# EAGLE board DC_brake(PIC) (EAGLE 7.4.0)
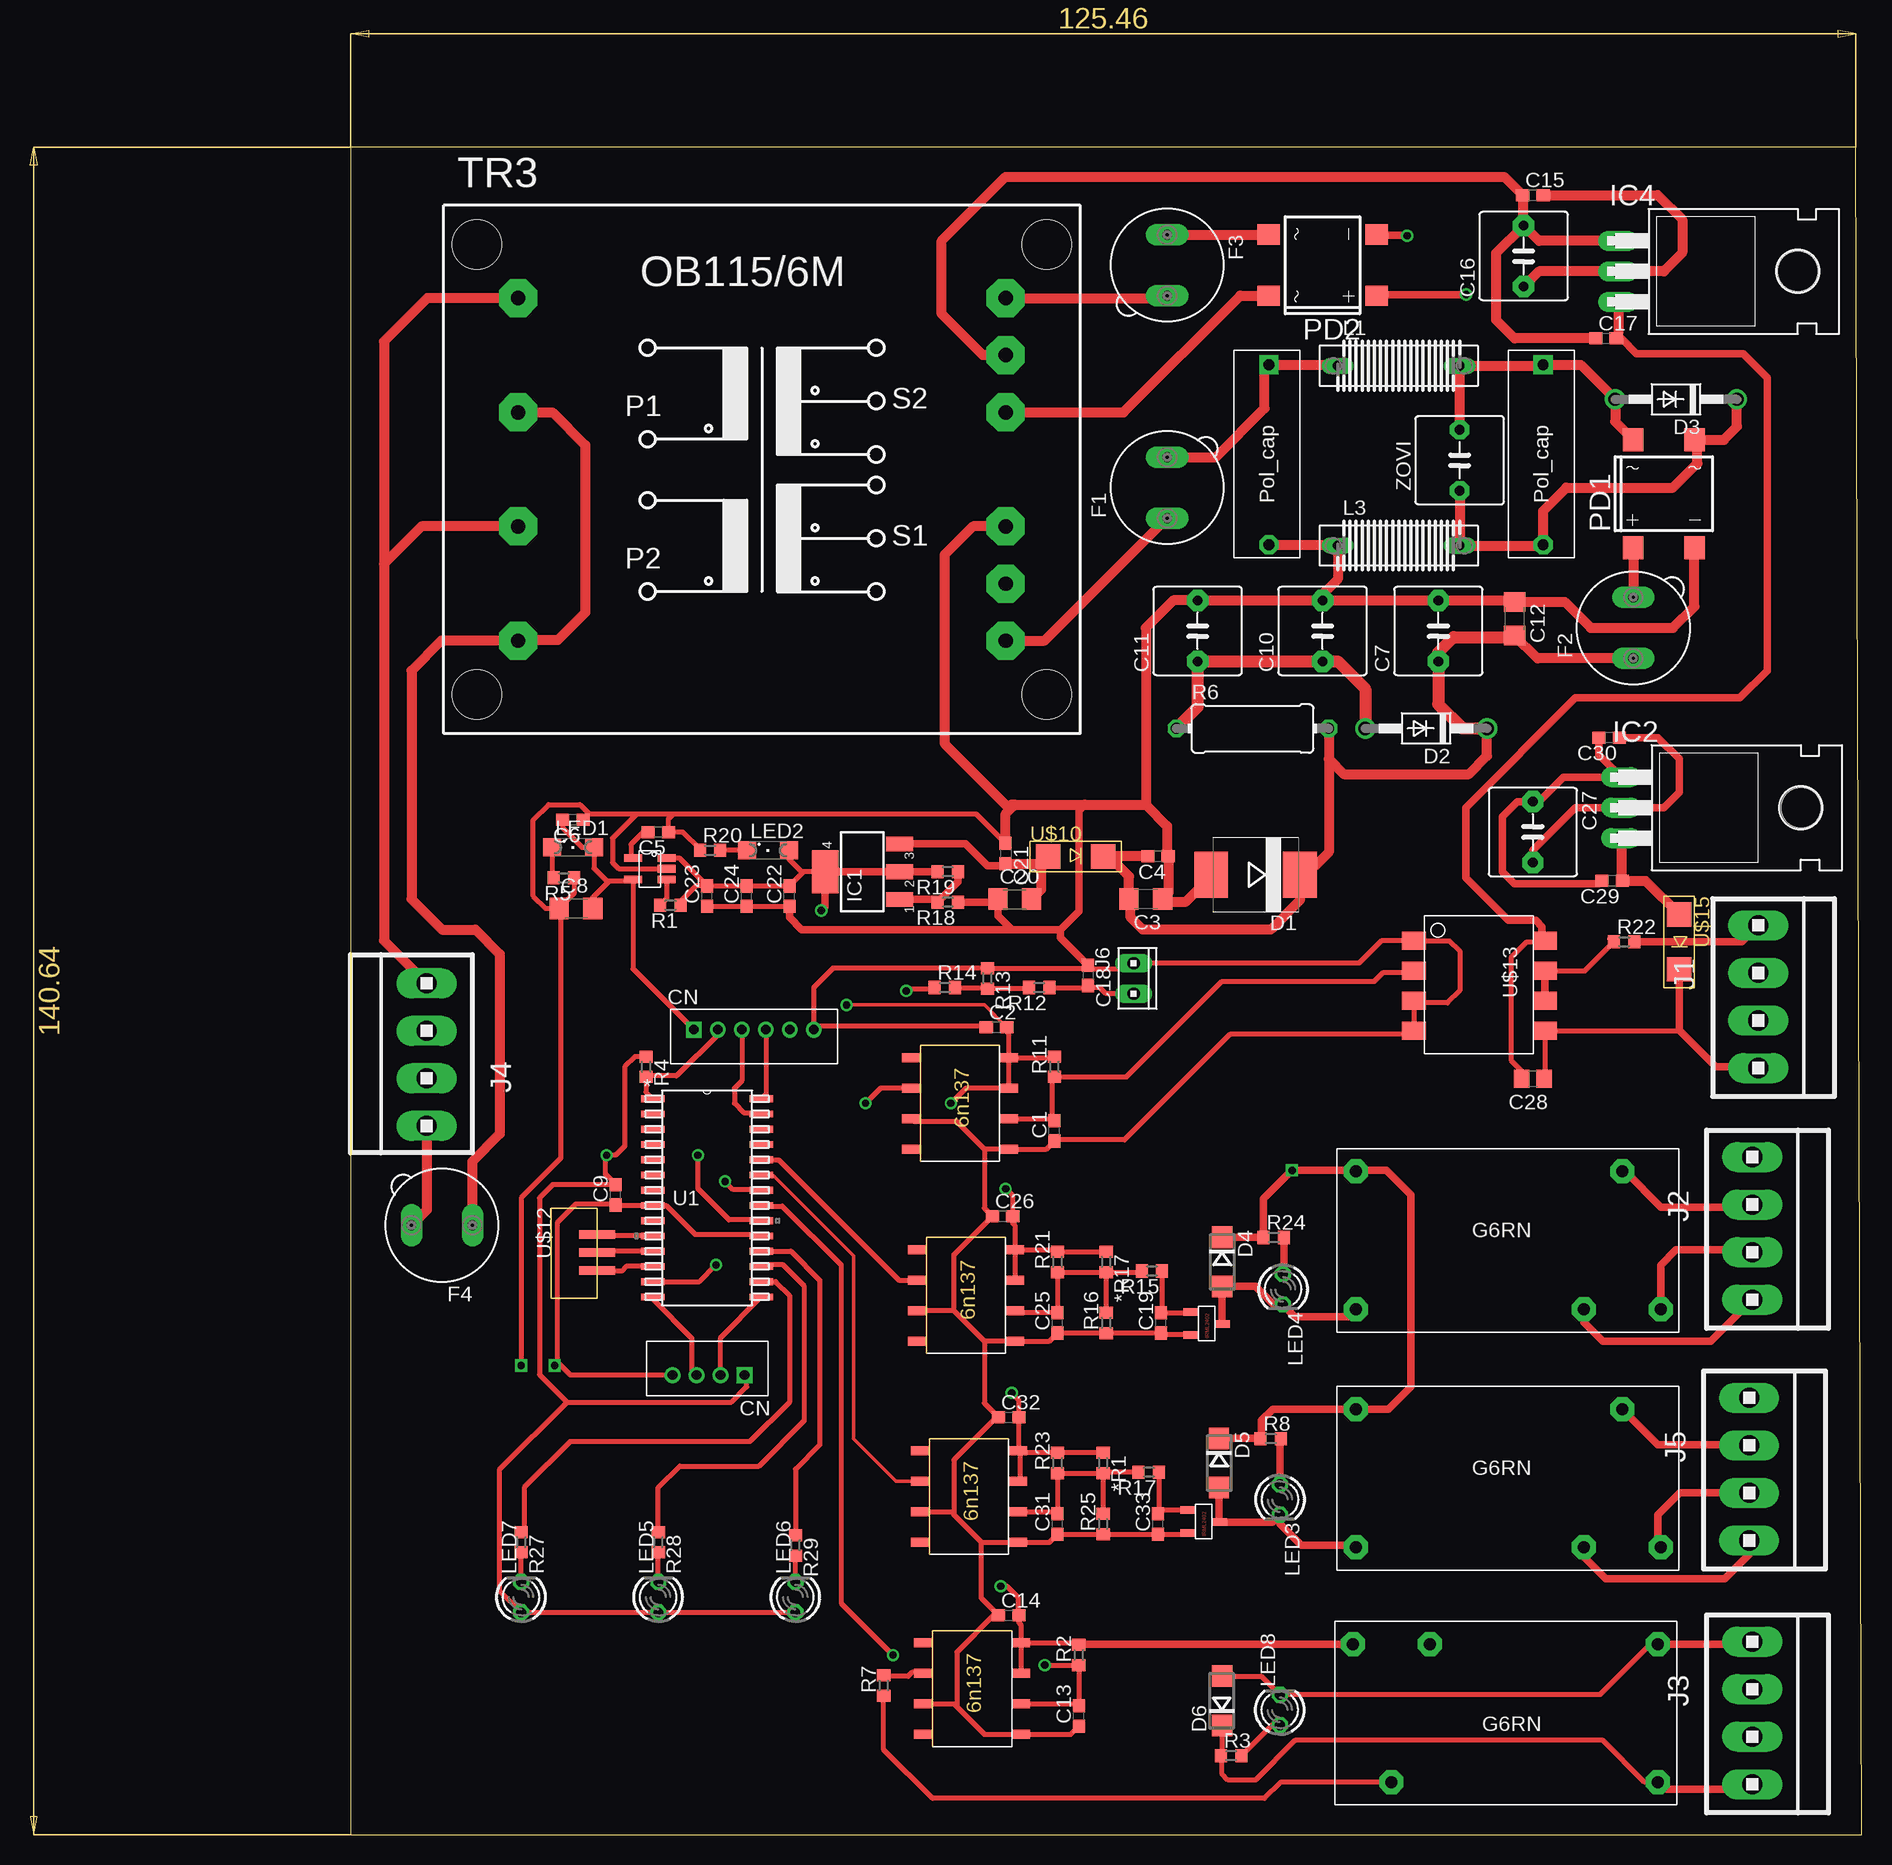
[diagram p0: board, top side]
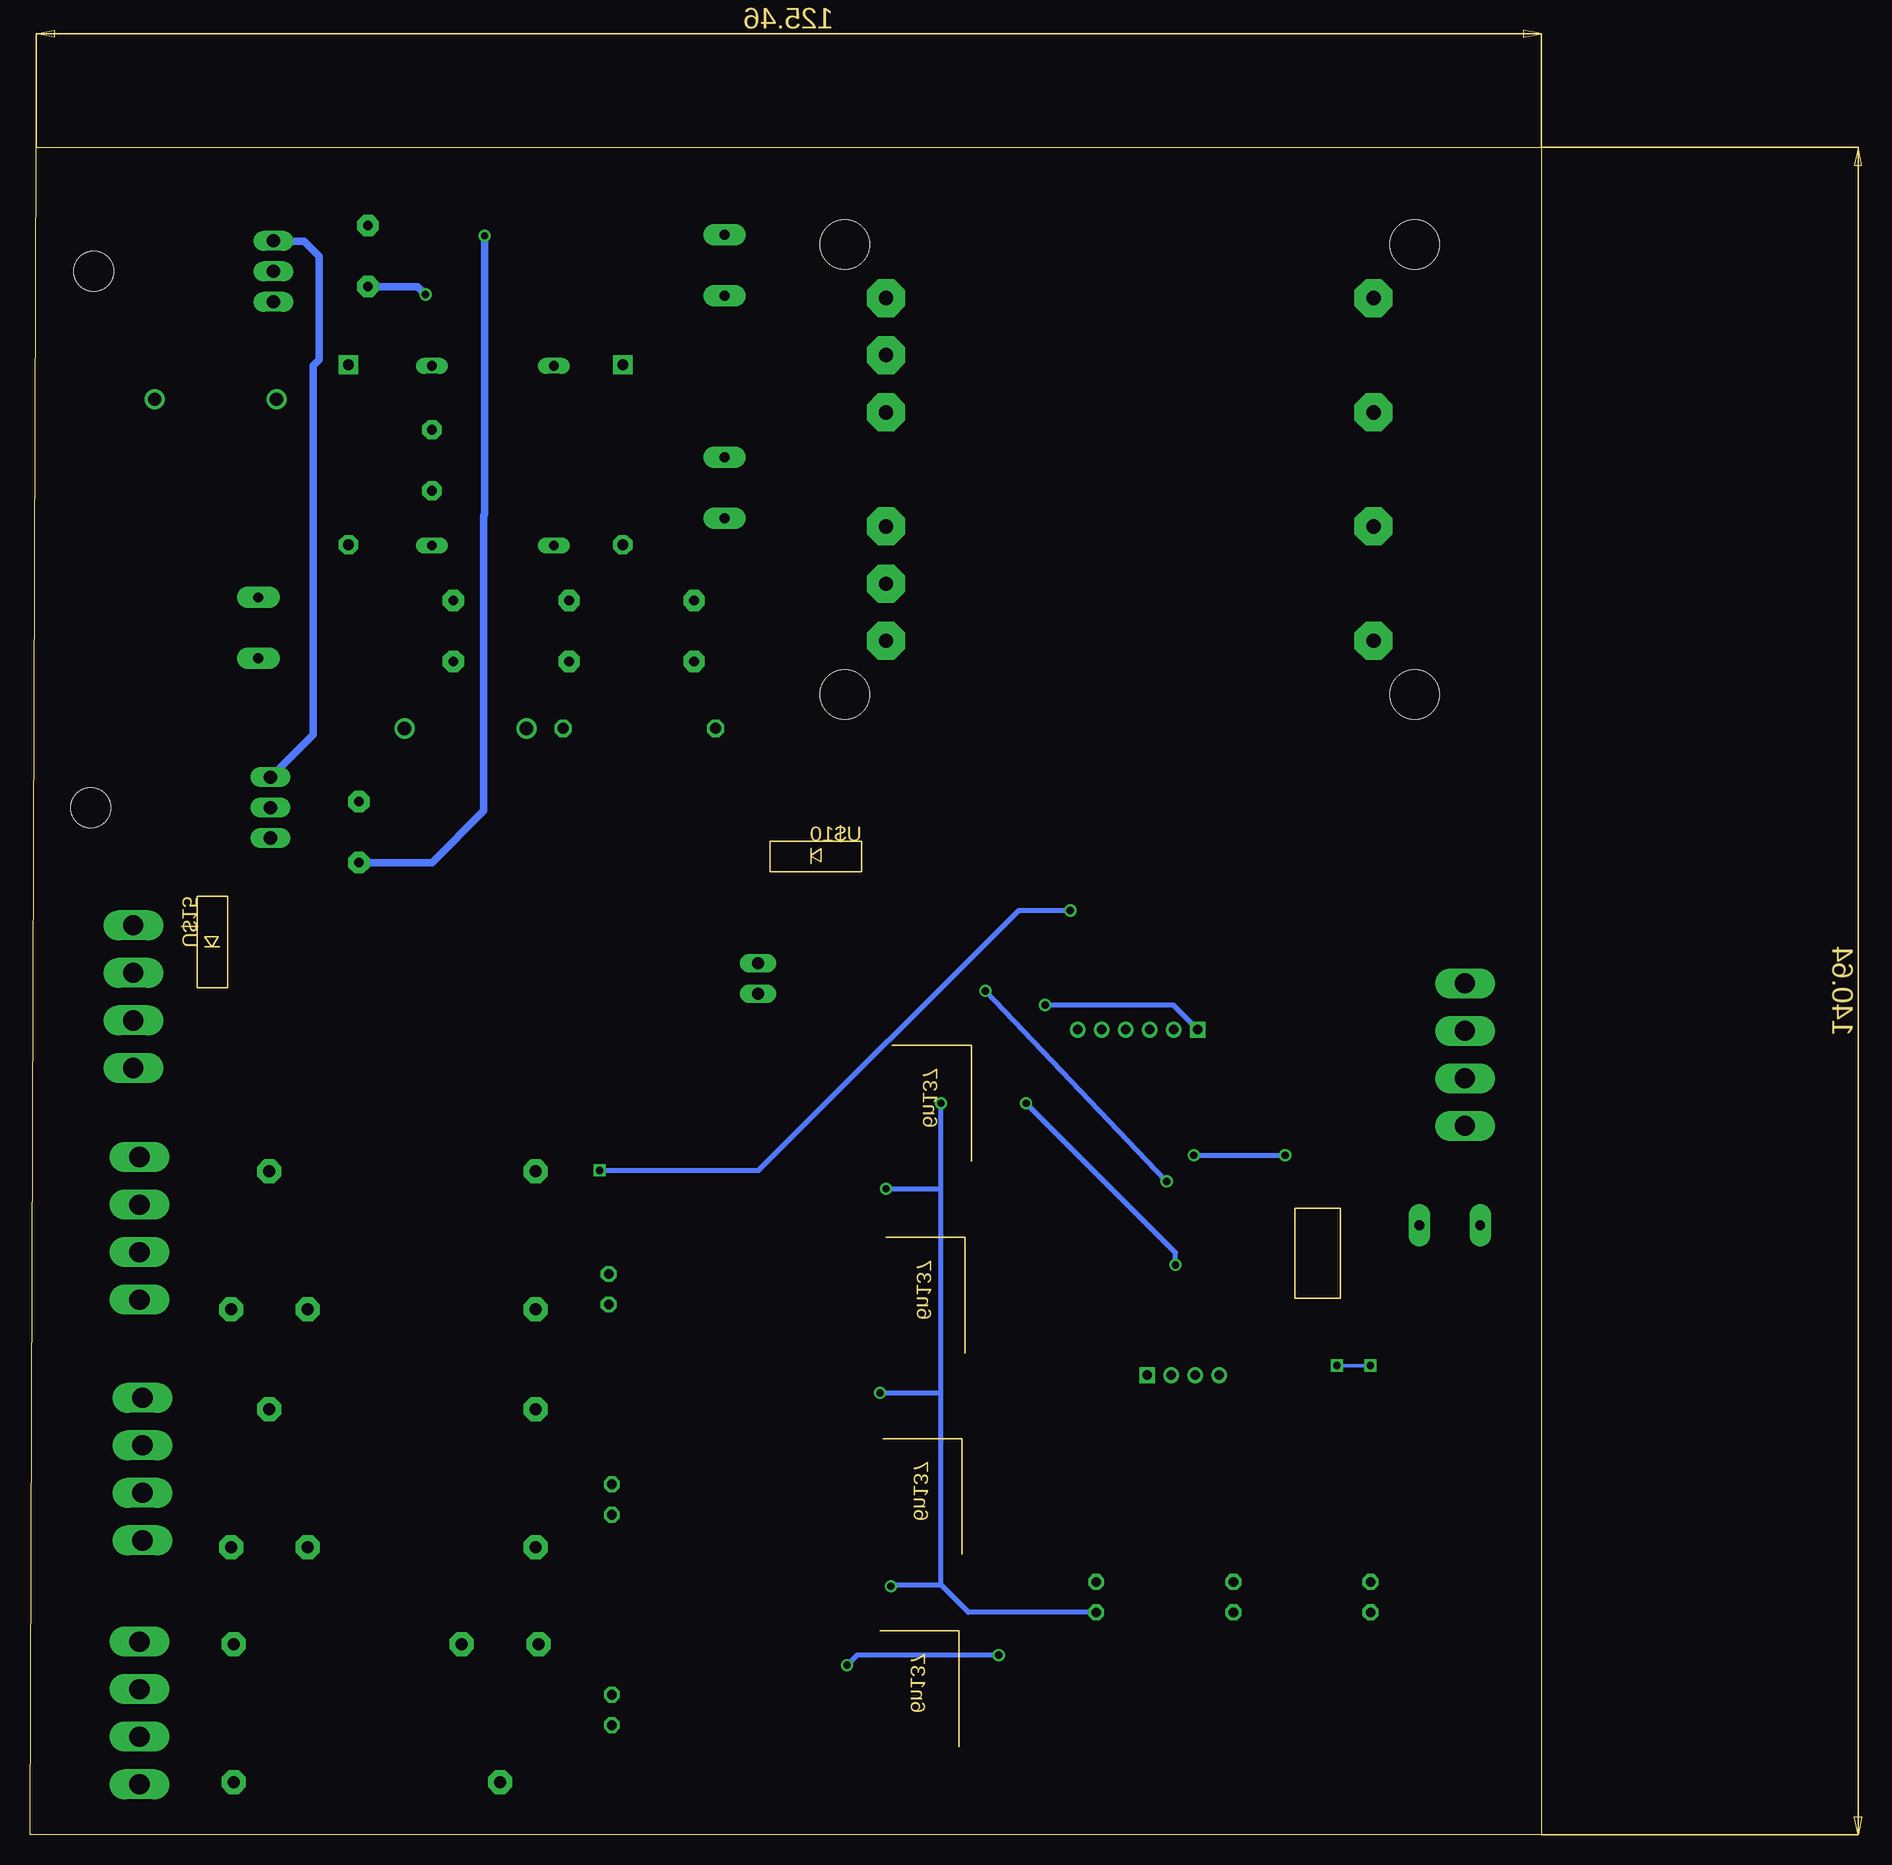
[diagram p1: board, bottom side, seen from below]

Size 125.96 x 140.64 mm. Coordinates in mm from the lower left corner, seen from the top.
Outline: 0,0 125.96,0 125.46,140.64 0,140.64 0,0
Copper layers (1*16): Top 0.035mm / dielectric 1.5mm / Bottom 0.035mm
Design rules "default": minimum track width 10mil, minimum drill 24mil, track to track 8mil, track to pad 8mil, pad to pad 8mil, via to via 8mil, smd to smd 8mil, copper to edge 40mil, drill to drill 8mil, minimum pad ring 10mil, minimum via ring 8mil, stop-mask expansion 4mil, vias tented up to drill 0mil, thermal gap 10mil

## Footprints (pad centres in the part's own frame; a part is rotated, then mirrored left to right if it is on the bottom)
R0603 = smd 1 x 1.1: 1 -0.85,0; 2 0.85,0
C0603 = smd 1.1 x 1: 1 -0.85,0; 2 0.85,0
C1206 = smd 1.6 x 1.8: 1 -1.4,0; 2 1.4,0
C050-075X075 = drill 0.813 pad 1.778 octagon: 1 -2.54,0; 2 2.54,0
C0805 = smd 1.3 x 1.5: 1 -0.95,0; 2 0.95,0
SMC = smd 2.8 x 3.8: A 3.7,0; C -3.7,0
DO41-10 = drill 1.118: A 5.08,0; C -5.08,0
DO214AC = smd 1.8 x 1.7: A 2.05,0; C -2.05,0
19560 = drill 0.813 pad 1.778 long: 1 -2.54,0; 2 2.54,0
SOT223 = smd 1.219 x 2.235: 1 -2.311,-3.099; 2 0,-3.099; 3 2.311,-3.099 | smd 3.6 x 2.2: 4 0,3.099
TO220H = drill 1.118 long: 1 -2.54,-10.16; 2 0,-10.16; 3 2.54,-10.16 | hole 3.302: 0,4.826
1X4MTA = drill 1.676 long: 1 5.944,0; 2 1.981,0; 3 -1.981,0; 4 -5.944,0
10X02MTA = drill 1.016 long: 1 1.27,0; 2 -1.27,0
DS10 = drill 0.813 long: 1 -5.08,0; 2 5.08,0
SML1206 = smd 1.5 x 1.5: A 1.75,0; C -1.75,0
LED3MM = drill 0.813 octagon: A -1.27,0; K 1.27,0
DBS = smd 1.7 x 1.9: + -2.55,-4.5; - 2.55,-4.5; AC1 -2.55,4.5; AC2 2.55,4.5
0411/12 = drill 0.914 octagon: 1 -6.35,0; 2 6.35,0
IRML2402 = smd 0.635 x 1.27: 1 -0.9,-1.3; 2 1,-1.3; 3 0.1,1.3
OB115/6M = drill 1.194 pad 3.175 octagon: 1 -20.32,14.275; 2 -20.32,4.75; 3 -20.32,-4.75; 4 -20.32,-14.275; 5 20.32,-14.275; 6 20.32,-9.525; 7 20.32,-4.75; 8 20.32,4.75; 9 20.32,9.525; 10 20.32,14.275 | hole 4.115: 23.749,18.745; 23.749,-18.745; -23.749,-18.745; -23.749,18.745
SOIC28-W_MC = smd 1.981 x 0.559: 1 -4.515,8.255; 2 -4.515,6.985; 3 -4.515,5.715; 4 -4.515,4.445; 5 -4.515,3.175; 6 -4.515,1.905; 7 -4.515,0.635; 8 -4.515,-0.635; 9 -4.515,-1.905; 10 -4.515,-3.175; 11 -4.515,-4.445; 12 -4.515,-5.715; 13 -4.515,-6.985; 14 -4.515,-8.255; 15 4.515,-8.255; 16 4.515,-6.985; 17 4.515,-5.715; 18 4.515,-4.445; 19 4.515,-3.175; 20 4.515,-1.905; 21 4.515,-0.635; 22 4.515,0.635; 23 4.515,1.905; 24 4.515,3.175; 25 4.515,4.445; 26 4.515,5.715; 27 4.515,6.985; 28 4.515,8.255
SMD = smd 0.635 x 1.524: 1 -0.89,1.454; 2 0.01,1.454; 3 0.91,1.454; 4 -0.89,-1.346; 5 0.91,-1.346
6N137 = smd 1.524 x 0.762: 1 -4.064,3.556; 2 -4.064,1.016; 3 -4.064,-1.524; 4 -4.064,-4.064; 5 4.064,-4.064; 6 4.064,-1.524; 7 4.064,1.016; 8 4.064,3.556
6PIN = drill 0.8 square: 1 -4.4,0.3 | drill 0.8: 2 -2.4,0.3; 3 -0.4,0.3; 4 1.6,0.3; 5 3.6,0.3; 6 5.6,0.3
RELAY = drill 1 pad 2 octagon: C1 -12.2,5.5; C2 -12.2,-6; COM 10,5.5; NC 6.8,-6; NO 13.2,-6
4PIN = drill 0.8 square: 1 -4.4,0.3 | drill 0.8: 2 -2.4,0.3; 3 -0.4,0.3; 4 1.6,0.3
POL_CAP = drill 0.9 pad 1.6 square: 1 -7.7,0.1 | drill 0.9 pad 1.6 octagon: 2 7.3,0.1
DIODE = smd 2.032 x 2.032: + -2.286,0; - 2.286,0
3PIN = smd 0.7 x 3: 1 -1.508,2.501; 2 -0.008,2.501; 3 1.492,2.501
HCPL-3120 = smd 1.5 x 2: 1(N/C) -4.654,-4.829; 2(AN) -2.154,-4.829; 3(CA) 0.346,-4.829; 4(N/C) 2.846,-4.829; 5(VEE) 2.846,6.071; 6(VO) 0.346,6.071; 7(VO) -2.154,6.071; 8(VCC) -4.654,6.071
C5B7.2 = drill 0.813 pad 1.6 octagon: 1 -2.54,0; 2 2.54,0

## Placement (x,y rotation side)
*R1  100  [R0603]  62.74,30.99 270 top
*R17  100  [R0603]  62.99,47.75 270 top
C1  [C0603]  58.67,58.67 90 top
C2  0.1uF  [C0603]  53.85,67.31 0 top
C3  10uF/16V  [C1206]  66.29,77.98 180 top
C4  100nF MRa  [C0603]  67.31,81.53 180 top
C5  1nF MRA  [C0603]  25.65,83.57 180 top
C6  1uF/10V  [C0603]  18.54,84.58 180 top
C7  4700uF/50V  [C050-075X075]  90.68,100.33 90 top
C8  10uF/16V  [C1206]  18.8,77.22 0 top
C9  100nF/10V  [C0603]  22.1,53.34 90 top
C10  4700uF/50v  [C050-075X075]  81.03,100.33 90 top
C11  4700uF/50v  [C050-075X075]  70.61,100.33 90 top
C12  10uF/16V  [C1206]  97.03,101.35 270 top
C13  [C0603]  60.71,9.91 90 top
C14  0.1uF  [C0603]  54.86,18.29 0 top
C15  100nF MRa  [C0603]  98.55,136.65 0 top
C16  4700uF/50v  [C050-075X075]  97.79,131.57 90 top
C17  10mF MRa  [C0603]  104.65,124.71 0 top
C18  [C0603]  61.47,71.63 270 top
C19  [C0603]  67.56,42.67 90 top
C20  1uF/50V  [C1206]  55.37,77.98 0 top
C21  100nF/50V  [C0603]  54.61,81.79 270 top
C22  100nF  [C0603]  36.58,78.23 90 top
C23  1uF  [C0603]  29.72,78.23 90 top
C24  10nF  [C0603]  33.02,78.23 90 top
C25  [C0603]  58.93,42.67 90 top
C26  0.1uF  [C0603]  54.36,51.56 0 top
C27  4700uF/50v  [C050-075X075]  98.55,83.57 270 top
C28  [C0805]  98.55,62.99 180 top
C29  10mF MRa  [C0603]  105.16,79.5 180 top
C30  100nF MRa  [C0603]  104.9,91.44 180 top
C31  [C0603]  58.93,25.91 90 top
C32  0.1uF  [C0603]  54.86,34.8 0 top
C33  [C0603]  67.31,25.91 90 top
D1  18V  [SMC]  75.44,80.01 180 top
D2  1N4004  [DO41-10]  89.66,92.2 180 top
D3  [DO41-10]  110.49,119.63 180 top
D4  [DO214AC]  72.64,47.75 270 top
D5  [DO214AC]  72.39,30.99 270 top
D6  [DO214AC]  72.64,11.18 90 top
F1  [19560]  68.07,112.27 90 top
F2  [19560]  106.93,100.58 90 top
F3  [19560]  68.07,130.81 270 top
F4  [19560]  7.62,50.8 180 top
IC1  317EMP  [SOT223]  42.67,80.26 90 top
IC2  lm7905  [TO220H]  116.08,85.6 270 top
IC4  lm7812  [TO220H]  115.82,130.3 270 top
J1  [1X4MTA]  117.35,69.85 270 top
J2  [1X4MTA]  116.84,50.55 270 top
J3  [1X4MTA]  116.84,10.16 270 top
J4  [1X4MTA]  6.35,65.02 90 top
J5  [1X4MTA]  116.59,30.48 270 top
J6  [10X02MTA]  65.28,71.37 270 top
L1  DS10  [DS10]  87.38,122.43 0 top
L3  DS10  [DS10]  87.38,107.44 0 top
LED1  [SML1206]  18.54,82.3 0 top
LED2  [SML1206]  34.8,82.04 0 top
LED3  [LED3MM]  77.47,27.94 270 top
LED4  [LED3MM]  77.72,45.47 270 top
LED5  [LED3MM]  25.65,19.81 90 top
LED6  [LED3MM]  37.08,19.81 90 top
LED7  [LED3MM]  14.22,19.81 90 top
LED8  [LED3MM]  77.47,10.41 90 top
PD1  DF01S  [DBS]  109.47,111.76 0 top
PD2  DF01S  [DBS]  81.03,130.81 90 top
R1  10K  [R0603]  26.67,77.47 180 top
R2  100  [R0603]  60.71,14.99 90 top
R3  100  [R0603]  73.41,6.6 0 top
R4  300  [R0603]  24.64,64.01 270 top
R5  10K  [R0603]  17.78,79.76 180 top
R6  [0411/12]  75.18,92.2 0 top
R7  100  [R0603]  44.45,12.45 90 top
R8  100  [R0603]  76.71,33.02 0 top
R11  100  [R0603]  58.67,64.01 90 top
R12  100  [R0603]  57.4,70.61 180 top
R13  100  [R0603]  53.09,71.37 270 top
R14  100  [R0603]  49.53,70.61 0 top
R15  100  [R0603]  66.8,46.99 180 top
R16  100  [R0603]  62.99,42.67 90 top
R17  100  [R0603]  66.55,30.23 180 top
R18  2K  [R0603]  49.78,77.72 180 top
R19  470R  [R0603]  49.78,80.26 180 top
R20  10K  [R0603]  29.97,82.04 0 top
R21  100  [R0603]  58.93,47.75 90 top
R22  100  [R0603]  106.17,74.42 0 top
R23  100  [R0603]  58.93,30.99 90 top
R24  100  [R0603]  76.96,49.78 0 top
R25  100  [R0603]  62.74,25.91 90 top
R27  100  [R0603]  14.22,24.38 270 top
R28  100  [R0603]  25.65,24.38 270 top
R29  100  [R0603]  37.08,24.13 270 top
T1  IRML2402  [IRML2402]  71.37,42.67 270 top
T2  IRML2402  [IRML2402]  71.12,26.16 270 top
TR3  [OB115/6M]  34.29,113.79 0 top
U1  PIC16F886-X/SO  [SOIC28-W_MC]  29.72,53.09 0 top
U$1  MIC5205-5.YMS  [SMD]  24.89,80.52 270 top
U$2  6N137  [6N137]  51.82,12.45 0 top
U$3  6N137  [6N137]  50.8,61.21 0 top
U$4  6PIN  [6PIN]  33.02,66.8 0 top
U$5  RELAY  [RELAY]  96.77,9.91 180 top
U$6  4PIN  [4PIN]  28.45,38.61 180 top
U$7  POLY_CAP  [POL_CAP]  76.45,114.81 270 top
U$8  POLY_CAP  [POL_CAP]  99.31,114.81 270 top
U$9  RELAY  [RELAY]  96.01,49.78 0 top
U$10  DIODE  [DIODE]  60.45,81.53 0 top
U$11  6N137  [6N137]  51.31,45.21 0 top
U$12  3PIN  [3PIN]  18.03,48.51 270 top
U$13  HCPL-3120  [HCPL-3120]  93.47,69.85 270 top
U$14  6N137  [6N137]  51.56,28.45 0 top
U$15  DIODE  [DIODE]  110.74,74.42 270 top
U$16  RELAY  [RELAY]  96.01,29.97 0 top
ZOVI  [C5B7.2]  92.46,114.55 90 top

## Library data of the parts
*R1 *R17 R2 R3 R6-R8 R11-R17 R21-R25 R27-R29 = resistor
C1 C2 C7 C10 C11 C13 C14 C16 C18 C19 C25-C27 C31-C33 R1 R4 R5 R18-R20 = rcl
C3-C6 C8 C9 C12 C15 C17 C20-C24 C28-C30 = eagle-ltspice; SPICEMODEL: NONE; SPICEPREFIX: C
D1-D6 U$10 U$15 = diode
F1-F4 = fuse; MPN: 56000001009; OC_FARNELL: 1185363; OC_NEWARK: 15P8392
IC1 IC2 IC4 = linear
J1-J6 = con-amp
L1 L3 = inductors
LED1-LED8 = led
PD1 PD2 = rectifier
T1 T2 = irlml2402
TR3 = trafo
U1 = pic16f883
U$1 = mic5205_5.0
U$2 U$3 U$11 U$14 = 6n137
U$4 = 6pin
U$5 U$9 U$16 = relay
U$6 = 4pin
U$7 U$8 = poly_cap
U$12 = 3pin
U$13 = hcpl_3120
ZOVI = capacitor-wima

## Nets
+12V: C17.2 C28.2 IC4.3 U$13.8(VCC)
-5V: C28.1 J1.1 U$13.5(VEE) U$15.-
CONTACT_RELAY: U1.24 U$11.2
D_GND: C15.1 C16.2 C17.1 C27.1 C29.2 C30.2 IC2.1 IC4.1 TR3.9
ES1: U1.12 U$12.3
ES2: U1.10 U$12.1
ES_COM: U1.11 U$12.2
GND: C1.1 C2.1 C3.1 C4.1 C5.1 C6.1 C7.2 C8.1 C9.1 C10.2 C11.2 C12.1 C13.1 C14.1 C18.1 C19.1 C20.1 C21.1 C22.1 C23.1 C24.1 C25.1 C26.1 C31.1 C32.1 C33.1 D1.A J6.2 L3.1 PD1.- R5.1 R13.1 R16.1 R18.1 R20.1 R25.1 T1.2 T2.2 TR3.7 U1.8 U1.19 U$1.2 U$2.3 U$2.5 U$3.3 U$3.5 U$4.6 U$6.4 U$7.2 U$11.3 U$11.5 U$13.1(N/C) U$13.3(CA) U$13.4(N/C) U$14.3 U$14.5
I2C_SCL: U1.14 U$6.3
I2C_SDA: U1.15 U$6.2
IGBT_TRIG: U1.13 U$3.2
LED1: R27.1 U1.16
LED2: R28.1 U1.17
LED3: R29.1 U1.18
N$1: C29.1 IC2.3 U$15.+
N$2: C5.2 U$1.4
N$3: F1.2 L1.1 U$7.1
N$4: R1.2 U$1.3
N$5: F4.1 TR3.2 TR3.4
N$6: F1.1 TR3.5
N$7: J4.1 TR3.1 TR3.3
N$8: F4.2 J4.4
N$9: J1.4 R22.2
N$10: C10.1 C11.1 D2.A R6.1
N$11: F3.2 TR3.10
N$12: J2.1 U$9.NC
N$13: C3.2 C4.2 C7.1 C12.2 D1.C D2.C F2.1 R6.2 U$10.-
N$14: LED1.C R5.2
N$15: D6.A J3.4 LED8.K U$5.C2
N$16: LED8.A R3.2
N$17: R7.2 U$2.2
N$18: R7.1 U$5.COM
N$19: D6.C J3.1 R3.1 U$5.C1
N$20: D5.A LED3.K T2.3 U$16.C2
N$21: LED3.A R8.2
N$22: J5.1 U$16.NC
N$23: J5.2 U$16.NO
N$24: J5.3 U$16.COM
N$26: PD2.AC1 TR3.8
N$27: D3.A L1.2 PD1.AC1 U$8.1 ZOVI.2
N$28: D3.C L3.2 PD1.AC2 U$8.2 ZOVI.1
N$29: F3.1 PD2.AC2
N$30: J2.2 U$9.NO
N$31: C1.2 R11.1 U$3.6 U$13.2(AN)
N$32: C15.2 C16.1 IC4.2 PD2.+
N$33: C18.2 J6.1 R12.1
N$34: J2.3 U$9.COM
N$35: F2.2 PD1.+
N$37: R12.2 R13.2 R14.2
N$38: C19.2 R15.1 T1.1
N$39: D4.A LED4.K T1.3 U$9.C2
N$40: C33.2 R17.1 T2.1
N$41: *R17.2 C25.2 R15.2 R16.2 R21.1 U$11.6
N$42: LED2.C R20.2
N$43: IC1.1 R18.2 R19.1
N$44: C20.2 C21.2 IC1.3 U$10.+
N$45: C27.2 C30.1 IC2.2 PD2.-
N$47: R22.1 U$13.6(VO) U$13.7(VO)
N$48: *R1.2 C31.2 R17.2 R23.1 R25.2 U$14.6
N$50: LED4.A R24.2
N$52: LED7.K R27.2
N$54: LED5.K R28.2
N$55: LED6.K R29.2
RST: R4.2 U1.1 U$4.2
RX: U1.28 U$4.4
S_CMD: C13.2 R2.1 U1.21 U$2.6
SER_RES_RELAY: U1.23 U$14.2
TEMP: R14.1 U1.22
TOOL: U$4.5
TX: U1.27 U$4.3
VCC: *R1.1 *R17.1 C2.2 C6.2 C8.2 C9.2 C14.2 C26.2 C32.2 LED1.A LED5.A LED6.A LED7.A R2.2 R4.1 R11.2 R21.2 R23.2 U1.20 U$1.5 U$2.7 U$2.8 U$3.7 U$3.8 U$4.1 U$5.NO U$6.1 U$11.7 U$11.8 U$14.7 U$14.8
VDD: C22.2 C23.2 C24.2 D4.C D5.C IC1.4 LED2.A R1.1 R8.1 R19.2 R24.1 U$1.1 U$9.C1 U$16.C1

## Tracks (layer width: path | path; a pad name or v marks a point on that pad's centre or on a via)
+12V
  Top 0.254: 99.47,74.39 U$13.8(VCC)
  Top 0.406: C28.2 97.6,63.69 96.77,64.52 96.77,73.15 98.04,74.42 99.46,74.42 U$13.8(VCC)
  Top 0.61: C17.2 105.92,124.71 107.19,123.44 116.08,123.44 118.11,121.41 118.11,97.03 115.82,94.74 102.11,94.74 92.96,85.6 92.96,79.76 96.52,76.2 98.81,76.2 99.31,75.69 99.31,74.73 U$13.8(VCC)
  Top 0.813: IC4.3 105.66,125.13 C17.2
-5V
  Top 0.406: 110.87,66.93 110.8,67 U$13.5(VEE) 99.54,63.03 C28.1
  Top 0.61: J1.1 117.25,64.01 113.79,64.01 110.87,66.93 110.74,67.06 U$15.- 110.49,71.88
CONTACT_RELAY
  Top 0.406: U1.24 35.69,56.26 45.72,46.23 U$11.2
D_GND
  Top 0.254: 104.11,91.06 C30.2
  Top 0.61: C29.2 104.05,79.25 97.03,79.25 96.01,80.26 96.01,84.84 97.28,86.11 C27.1 99.06,86.11 101.09,88.14 IC2.1 104.05,90 C30.2
  Top 0.813: TR3.9 52.7,123.32 49.28,126.75 49.28,132.84 54.61,138.18 96.18,138.18 C15.1 97.7,134.2 C16.2 | IC4.1 99.06,132.84 C16.2 | C17.1 97.03,124.71 95.5,126.24 95.5,131.83 C16.2
  Bottom 0.254: 105.54,132.81 IC4.1
  Bottom 0.61: 105.54,132.81 103.09,132.81 101.85,131.57 101.85,122.94 102.36,122.43 102.36,91.69 IC2.1
ES1
  Top 0.406: U1.12 22.99,47.37 22.61,46.99 20.57,46.99 U$12.3
ES2
  Top 0.406: U1.10 21.46,49.91 21.34,50.04 20.55,50.04 U$12.1
ES_COM
  Top 0.406: U1.11 20.66,48.64 U$12.2
GND  (via drill 0.6)
  Top 0.305: v17.02,39.12 17.27,39.37
  Top 0.406: R20.1 29.12,82.13 27.69,83.57 C5.1 26.5,84.67 26.92,85.09 | 23.88,85.09 21.84,83.06 21.84,81.03 22.35,80.52 26.34,80.52 U$1.2 | 19.9,85.09 C6.1 | R5.1 18.63,78.45 C8.1 | 19.9,85.09 19.14,85.85 16.51,85.85 15.24,84.58 15.24,78.23 16.26,77.22 C8.1 | C2.1 53.09,67.4 38.92,67.4 U$4.6 38.61,67.11 38.61,70.61 40.22,72.22 R13.1 61.21,72.22 C18.1 61.81,72.14 64.77,72.14 J6.2 84.07,72.64 85.93,74.5 U$13.1(N/C) 91.61,74.5 92.46,73.66 92.46,70.36 91.44,69.34 88.81,69.34 U$13.3(CA) U$13.4(N/C) 88.35,66.71 73.32,66.71 64.52,57.91 58.76,57.91 C1.1 58,57.15 U$3.5 52.83,57.15 | 52.83,57.15 50.55,59.44 46.99,59.44 U$3.3 | T1.2 67.71,41.67 C19.1 R16.1 C25.1 | C25.1 58.93,41.66 | C25.1 58.25,41.15 U$11.5 52.83,41.15 | 52.83,41.15 50.29,43.69 | 50.29,43.69 U$11.3 | T2.2 69.72,25.06 C33.1 R25.1 C31.1 58.25,24.38 U$14.5 52.58,24.38 | 52.83,41.15 52.83,35.98 C32.1 53.85,34.8 50.29,31.24 50.29,26.92 | U$6.4 18.33,38.31 17.27,39.37 17.27,51.05 18.8,52.58 22.01,52.58 C9.1 25.16,52.49 U1.8 26.29,52.45 28.7,50.04 34.11,50.04 U1.19 | 52.83,57.15 52.83,52.24 C26.1 50.29,48.35 50.29,43.69 | U$14.3 50.29,26.92 | 50.29,26.92 50.29,26.67 52.58,24.38 | 50.55,10.67 50.55,15.24 53.59,18.29 C14.1 52.58,19.72 52.58,24.38 | U$2.3 50.29,10.92 50.55,10.67 | 50.55,10.67 52.83,8.38 U$2.5 60.03,8.38 C13.1 | C8.1 17.53,77.09 17.53,56.39 14.22,53.09 v14.22,39.12 | 19.9,85.09 23.88,85.09 | 23.88,85.09 26.92,85.09 | C23.1 C24.1 C22.1 | 26.92,85.09 52.16,85.09 C21.1
  Top 0.61: R18.1 53.72,77.72 C20.1 53.97,76.58 55.12,75.44 | 59.18,75.44 60.71,76.96 60.71,85.34 61.21,85.85 | C22.1 36.58,76.45 37.59,75.44 55.12,75.44 | 55.12,75.44 59.18,75.44 | 59.18,75.44 59.18,74.76 C18.1
  Top 0.813: D1.A 71.74,79.87 69.6,77.72 67.95,77.72 C3.1 68.16,78.44 C4.1 68.07,81.62 68.07,84.07 66.29,85.85 | 55.12,85.85 55.37,85.85 | 55.37,85.85 61.21,85.85 66.29,85.85 | C21.1 54.61,85.09 54.99,85.47 | 54.99,85.47 55.37,85.85 | 80.52,102.87 C11.2 68.58,102.87 66.29,100.58 66.29,85.85 | 80.52,102.87 C10.2 C7.2 96.9,102.87 C12.1 101.22,102.75 103.38,100.58 110.24,100.58 112.01,102.36 112.01,107.25 PD1.- | U$7.2 82.23,107.51 L3.1 82.3,104.65 80.52,102.87 | TR3.7 51.89,109.04 49.53,106.68 49.53,90.93 54.99,85.47
  Bottom 0.254: 38.43,67.03 U$4.6
  Bottom 0.305: v14.22,39.12 v17.02,39.12
I2C_SCL
  Top 0.406: U1.14 25.2,44.65 28.45,41.4 28.45,38.71 U$6.3
I2C_SDA
  Top 0.406: U$6.2 30.85,41.45 U1.15
IGBT_TRIG  (via drill 0.6)
  Top 0.406: U1.13 29.08,46.1 v30.48,47.5 | U$3.2 44.2,62.23 v42.93,60.96
  Bottom 0.406: v30.48,47.5 30.48,48.51 v42.93,60.96
LED1
  Top 0.406: U1.16 35.43,46.1 36.58,44.96 36.58,36.07 33.27,32.77 18.29,32.77 14.48,28.96 14.48,25.49 R27.1
LED2
  Top 0.406: R28.1 25.65,28.96 27.43,30.73 34.04,30.73 37.85,34.54 37.85,45.72 36.07,47.5 34.36,47.5 U1.17
LED3
  Top 0.406: U1.18 36.7,48.64 39.12,46.23 39.12,32.51 37.08,30.48 R29.1
N$1
  Top 0.813: IC2.3 105.92,79.59 C29.1 107.95,79.5 U$15.+
N$2
  Top 0.406: C5.2 24.38,83.57 23.37,82.55 23.37,81.59 U$1.4
N$3
  Top 0.813: 76.47,122.43 U$7.1 | F1.2 72.14,114.81 76.2,118.87 76.2,122.15 U$7.1 | U$7.1 82.22,122.51
  Top 1.016: 82.22,122.51 L1.1
N$4
  Top 0.406: U$1.3 26.35,78 R1.2
N$5
  Top 0.813: 13.92,99.57 TR3.4 | TR3.2 16.84,118.54 19.56,115.82 19.56,101.85 17.27,99.57 14.02,99.57 TR3.4 | TR3.4 7.57,99.52 5.08,97.03 5.08,77.98 7.62,75.44 10.41,75.44 12.45,73.41 12.45,58.42 10.16,56.13 F4.1
N$6
  Top 0.813: TR3.5 57.86,99.52 F1.1
N$7
  Top 0.813: TR3.1 6.4,128.07 2.79,124.46 2.79,105.92 | 2.79,105.92 2.79,74.52 J4.1 | TR3.3 5.92,109.04 2.79,105.92
N$8
  Top 0.813: J4.4 6.35,52.07 F4.2
N$9
  Top 0.61: R22.2 115.98,74.42 J1.4
N$10
  Top 1.016: R6.1 70.61,93.98 C11.1 C10.1 82.3,97.79 84.58,95.5 D2.A
N$11
  Top 0.813: TR3.10 67.87,128.07 F3.2
N$12
  Top 0.61: U$9.NC 102.81,42.73 104.39,41.15 113.39,41.15 J2.1
N$13
  Top 0.813: C4.2 63.25,81.53 | 63.25,81.53 U$10.- | 63.25,81.53 64.89,79.89 C3.2 65.02,77.85 65.02,76.45 66.04,75.44 76.71,75.44 79.14,77.87 79.14,79.5 | D1.C 79.14,79.5 | F2.1 98.93,98.04 C12.2 | 79.14,79.5 81.53,81.9 R6.2 81.53,89.66 82.8,88.39 93.22,88.39 94.74,89.92 D2.C
  Top 1.016: D2.C 92.71,92.2 90.68,94.23 C7.1 90.68,98.55 91.95,99.82 96.9,99.82 C12.2
N$14
  Top 0.406: LED1.C 16.79,79.89 R5.2
N$15
  Top 0.406: U$5.C2 108.36,15.91 104.14,11.68 LED8.K 75.93,13.23 D6.A
  Top 0.61: U$5.C2 116.64,15.91 J3.4
N$16
  Top 0.406: LED8.A 76.8,9.14 R3.2
N$17
  Top 0.406: U$2.2 47.24,13.46 47.16,13.55 46.82,13.55 46.48,13.21 44.54,13.21 R7.2
N$18
  Top 0.406: U$5.COM 77.56,4.41 76.2,3.05 48.51,3.05 44.45,7.11 R7.1
N$19
  Top 0.406: D6.C 72.64,6.69 R3.1 72.64,6.52 72.64,5.08 73.15,4.57 75.44,4.57 78.74,7.87 104.39,7.87 107.86,4.41 U$5.C1
  Top 0.61: U$5.C1 109.13,4.41 109.73,3.81 116.43,3.81 J3.1
N$20
  Top 0.61: U$16.C2 83.65,24.13 79.25,24.13 77.47,25.91 LED3.K 76.86,26.06 T2.3 72.39,26.09 D5.A
N$21
  Top 0.61: LED3.A 77.47,32.93 R8.2
N$22
  Top 0.61: U$16.NC 102.81,23.17 104.65,21.34 114.55,21.34 116.59,23.37 J5.1
N$23
  Top 0.61: J5.2 110.8,28.5 108.97,26.67 108.97,24.22 U$16.NO
N$24
  Top 0.61: U$16.COM 108.97,32.51 116.54,32.51 J5.3
N$26
  Top 0.813: TR3.8 64.44,118.54 74.17,128.27 PD2.AC1
N$27
  Top 0.813: ZOVI.2 L1.2 99.33,122.43 U$8.1 102.54,122.51 D3.A 105.41,117.77 PD1.AC1
N$28
  Top 0.813: ZOVI.1 L3.2 99.35,107.44 U$8.2 99.41,110.34 101.35,112.27 110.24,112.27 112.27,114.3 112.27,116.02 PD1.AC2 114.48,116.26 115.57,117.35 D3.C
N$29
  Top 0.813: F3.1 75.69,133.35 75.95,133.1 76.26,133.1 PD2.AC2
N$30
  Top 0.61: U$9.NO 109.21,47.49 110.49,48.77 116.64,48.77 J2.2
N$31
  Top 0.406: U$3.6 58.51,59.69 | 58.51,59.69 C1.2 | 58.51,59.69 58.51,62.99 R11.1 64.68,63.16 72.64,71.12 85.34,71.12 86.11,71.88 88.52,71.88 U$13.2(AN)
N$32  (via drill 0.61)
  Top 0.254: 85.54,128.36 PD2.+
  Top 0.61: 85.54,128.36 v93,128.36
  Top 0.813: C15.2 108.97,136.65 111,134.62 111,131.83 109.47,130.3 IC4.2 99.06,130.3 C16.1
  Bottom 0.254: 97.76,129 C16.1
  Bottom 0.61: 97.76,129 93.63,129 v93,128.36
N$33
  Top 0.406: R12.1 61.3,70.61 C18.2 | 61.56,70.87 C18.2 | J6.1 62.99,70.1 62.48,70.61 61.63,70.61 C18.2
N$34
  Top 0.61: U$9.COM 106.26,55.28 109.22,52.32 116.64,52.32 J2.3
N$35
  Top 0.813: PD1.+ F2.2
N$37
  Top 0.406: R12.2 56.47,70.52 R13.2 53,70.61 R14.2
N$38
  Top 0.406: R15.1 67.65,43.61 C19.2 70.02,43.52 T1.1
N$39
  Top 0.61: T1.3 72.64,42.6 D4.A 72.66,45.72 75.44,45.72 76.96,44.2 LED4.K 78.74,43.18 83.21,43.18 U$9.C2
N$40
  Top 0.406: R17.1 67.4,26.85 C33.2 67.61,27.06 T2.1
N$41
  Top 0.406: *R17.2 R21.1 C25.2 55.54,43.52 U$11.6 | *R17.2 65.86,46.9 R15.2 | *R17.2 R16.2
N$42
  Top 0.406: LED2.C R20.2
N$43
  Top 0.61: R19.1 50.63,79.42 R18.2 48.7,77.95 IC1.1
N$44
  Top 0.61: IC1.3 51.28,82.58 53.09,80.77 54.44,80.77
  Top 0.813: 54.52,81.03 C21.2 | 57.57,80.94 U$10.+ | 54.44,80.77 C21.2 | C21.2 57.57,80.94 | 57.57,80.94 57.57,78.78 C20.2
N$45  (via drill 0.61)
  Top 0.254: 85.54,133.29 PD2.-
  Top 0.61: C27.2 98.55,82.04 102.11,85.6 IC2.2 109.47,85.6 110.74,86.87 110.74,89.66 108.97,91.44 C30.1 | 85.54,133.29 88.04,133.29 v88.07,133.25
  Bottom 0.254: 98.55,81.06 C27.2
  Bottom 0.61: C27.2 92.46,81.03 88.14,85.34 88.14,109.98 88.07,110.05 v88.07,133.25
N$47
  Top 0.406: U$13.7(VO) 102.9,72 R22.1
  Top 0.61: U$13.7(VO) U$13.6(VO) | 105.07,74.68 R22.1
N$48
  Top 0.406: R17.2 62.83,30.23 *R1.2 | *R1.2 R25.2 | *R1.2 R23.1 C31.2 58.76,26.92 U$14.6
N$50
  Top 0.61: R24.2 77.81,46.82 LED4.A
N$52
  Top 0.406: LED7.K R27.2
N$54
  Top 0.406: LED5.K R28.2
N$55
  Top 0.406: LED6.K R29.2
RST
  Top 0.406: U1.1 24.64,61.91 R4.2 24.73,63.25 27.18,63.25 30.62,66.69 U$4.2
RX
  Top 0.406: U$4.4 34.62,61.73 U1.28
S_CMD  (via drill 0.6, 0.61)
  Top 0.254: 34.77,52.4 34.31,52.4 U1.21
  Top 0.406: 34.77,52.4 35.99,52.4 40.89,47.5 40.89,19.3 v45.21,14.99 | R2.1 C13.2 60.54,10.92 U$2.6 | 60.62,14.22 R2.1 | v57.86,14.15 60.69,14.15 R2.1
  Bottom 0.406: v45.21,14.99 57.02,14.99 v57.86,14.15
SER_RES_RELAY
  Top 0.254: 35,54.91 34.31,54.91 U1.23
  Top 0.305: U$14.2 45.47,29.46 41.91,33.02 41.91,48.26 35.26,54.91 35,54.91
TEMP  (via drill 0.61)
  Top 0.254: 33.63,53.77 34.09,53.77 U1.22 | 48.49,70.46 R14.1
  Top 0.406: 48.49,70.46 46.46,70.46 v46.33,70.33 | 33.63,53.77 31.9,53.77 v31.22,54.46
  Bottom 0.406: v31.22,54.46 v46.33,70.33
TX
  Top 0.406: U$4.3 32.62,62.85 32,62.23 32,60.96 32.77,60.2 34.11,60.2 U1.27
VCC  (via drill 0.6, 0.61)
  Top 0.254: 34.09,51.26 U1.20 | 22.2,54 C9.2 | 54.66,67.49 C2.2 | 62.89,31.83 *R1.1 | 55.57,18.34 C14.2 | 55.21,50.97 55.21,51.05 55.21,51.37 C26.2
  Top 0.305: v41.35,69.16 52.84,69.16 C2.2 | 60.78,15.91 R2.2
  Top 0.406: C6.2 17.69,83.91 19.3,82.3 LED1.A 20.29,80.55 21.46,79.38 | 21.46,79.38 20.2,78.11 C8.2 20.32,77.22 | 21.46,79.38 21.59,79.5 23.44,79.5 U$1.5 23.55,72.18 U$4.1 28.45,67.27 | 54.7,64.94 U$3.8 | U$3.8 58.59,64.77 R11.2 | 55.21,48.93 U$11.8 | *R17.1 R21.2 58.76,48.77 U$11.8 | *R1.1 R23.2 55.79,31.84 | 55.79,31.84 U$14.8 55.71,32.09 C32.2 55.71,36.23 v55.12,36.83 | U$11.8 U$11.7 | 55.79,31.84 55.79,29.63 U$14.7 | 55.71,16.17 U$2.8 | U$2.8 U$2.7 | 18.03,36.07 15.75,38.35 15.75,53.09 16.85,54.19 C9.2 21.25,55.04 21.25,56.55 v21.34,56.64 | 18.03,36.07 31.75,36.07 33.02,37.34 33.02,38.14 U$6.1 | LED6.A LED5.A LED7.A 12.45,20.32 12.45,30.48 18.03,36.07 | 34.09,51.26 31.55,51.26 28.96,53.85 v28.96,56.64 | 21.25,56.73 v21.34,56.64 | U$2.8 60.54,16 R2.2 | U$2.8 55.88,17.53 55.71,17.69 C14.2 55.63,18.38 55.63,19.81 54.71,20.73 v54.2,20.73 | C2.2 54.7,66.97 54.86,66.8 U$3.8 | 55.21,50.97 55.37,50.8 U$11.8 | C26.2 55.21,53.25 v54.61,53.85 | v50.04,60.96 51.31,62.23 U$3.7 U$3.8 | R4.1 23.71,64.86 22.86,64.01 22.86,57.4 22.1,56.64 v21.34,56.64
  Top 0.61: 60.78,15.91 U$5.NO
  Bottom 0.305: 54.1,20.83 v54.2,20.73
  Bottom 0.406: v28.96,56.64 v21.34,56.64 | LED6.A 47.75,18.54 50.04,20.83 | 50.04,20.83 50.04,36.83 | 50.04,36.83 50.04,53.85 | 50.04,53.85 v50.04,60.96 | 54.1,20.83 50.04,20.83 | v55.12,36.83 50.04,36.83 | v54.61,53.85 50.04,53.85 | v41.35,69.16 30.68,69.16 U$4.1
VDD  (via drill 0.6, 0.61)
  Top 0.406: IC1.4 37.76,80.26 37.67,80.18 | 37.67,80.18 C22.2 C24.2 C23.2 | LED2.A 36.55,81.31 37.67,80.18 | U$1.1 27.39,81.41 C23.2 | C23.2 28.79,79.08 27.52,77.81 R1.1
  Top 0.61: D4.C 76.09,49.8 R24.1 76.11,53 v78.49,55.37 83.72,55.37 U$9.C1 83.9,55.37 86.36,55.37 88.39,53.34 88.39,37.34 86.53,35.47 U$16.C1 76.87,35.47 75.95,34.54 75.95,33.11 R8.1 75.84,33.04 D5.C | R19.2 IC1.4 39.57,77.36 v39.24,77.03
  Bottom 0.254: 83.79,55.34 U$9.C1
  Bottom 0.406: v78.49,55.37 65.22,55.37 43.56,77.03 v39.24,77.03